# Altium PCB overlay dan masking.PcbDoc (part 3 of 3)
Units mil, origin at the board's own origin, x right, y up, seen from the top; angles counter-clockwise.
Board outline 6000 x 4000 mil, 2 copper layers (Top Layer, Bottom Layer); 120 components, 0 nets, 410 pads, 0 vias.
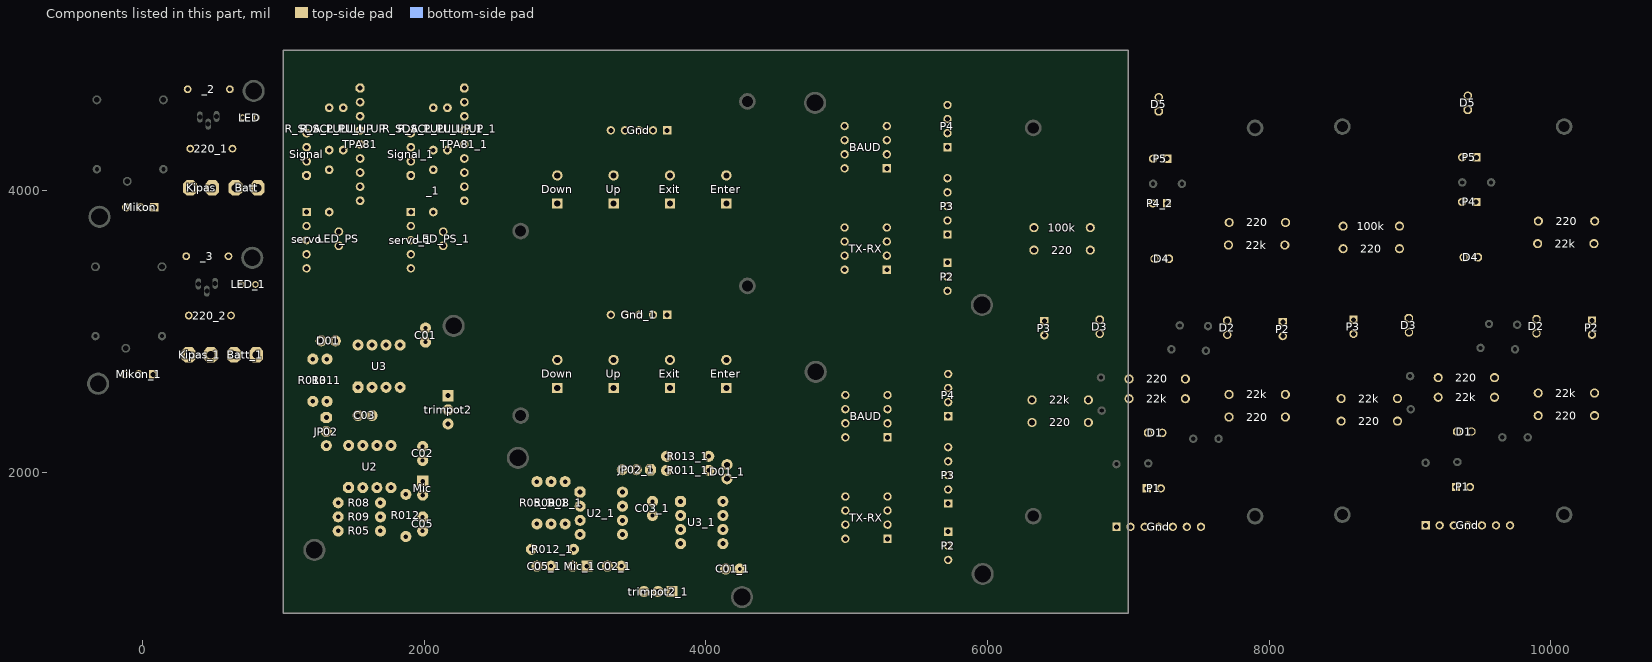
[diagram p3: the components of this part, seen from the top]

## Nets (pads, with @x,y where several pads share a name; then routed paths per layer and width w, separated by ;. In a path a pad name is that pad's centre, name@x,y a point inside that pad or via, vN(x,y) a via of type N, cw(c..) or ccw(c..) an arc to the next point about the centre after c; other vN are vias at no path point) (continued)
copper on no net: (continued)
  Bottom Layer w23.62: -347.68,2964.68 27.2,3339.57 397.28,3339.57 ; -337.68,4149.69 37.2,4524.57 407.28,4524.57 ; -334.06,2969.17 -320.67,2969.17 ; -324.06,4154.17 -310.67,4154.17 ; -125.55,2697.83 -197.2,2769.49 -197.2,2892.9 24.89,3115 328.7,3115 ; -115.55,3882.83 -187.2,3954.49 -187.2,4077.9 34.89,4300 338.7,4300 ; -39.25,2697.83 -25.55,2697.83 -25.55,2637.2 -59.41,2603.35 -165.71,2603.35 -205.08,2642.72 -205.08,2701.77 -327.13,2823.82 -386.18,2823.82 -457.05,2894.68 -457.05,3182.09 -102.72,3536.42 310.28,3536.42 ; -29.25,3882.83 -15.55,3882.83 -15.55,3822.2 -49.41,3788.35 -155.71,3788.35 -195.08,3827.72 -195.08,3886.77 -317.13,4008.82 -376.18,4008.82 -447.05,4079.68 -447.05,4367.09 -92.72,4721.42 320.28,4721.42 ; 74.45,2697.83 157.13,2615.16 779.17,2615.16 909.09,2745.08 909.09,3128.15 701.61,3335.63 693.74,3343.5 515.39,3343.5 523.27,3351.38 ; 84.45,3882.83 167.13,3800.16 789.17,3800.16 919.09,3930.08 919.09,4313.15 711.61,4520.63 703.74,4528.5 525.39,4528.5 533.27,4536.38 ; 456.34,3288.39 628.7,3116.02 628.7,3115 ; 466.34,4473.39 638.7,4301.02 638.7,4300 ; 610.28,3536.42 610.28,3526.97 801.61,3335.63 ; 620.28,4721.42 620.28,4711.97 811.61,4520.63 ; 1145,4110 1245,4010 1245,3750 1275.62,3719.38 1384.5,3610.5 1454.5,3610.5 1455,3610 1465,3610 1485,3630 1485,3710 1425,3770 1405,3790 1405,4091.25 1482.5,4168.75 1482.5,4255.89 1545,4318.38 1545,4330 ; 1145,4210 1178.6,4176.4 1318.6,4176.4 1325,4170 ; 1154.08,4200.92 1102.5,4252.5 1102.5,4281.62 1102.5,4467.5 1225,4590 1325,4590 1425,4590 1425,4650 1505,4730 1545,4730 ; 1165,3450 1205,3450 1245,3490 1285,3530 1465,3530 1545,3610 1545,3730 1465,3810 1465,4090 1505,4130 1545,4130 ; 1165,3550 1205,3550 1245,3590 1245,3670 1165,3750 ; 1165,3650 1145,3650 1105,3690 1105,3722.68 1103.98,3723.7 1103.98,3788.98 1165,3850 ; 1165,4310 1180.01,4310 1262.5,4227.5 1321.69,4227.5 1362.5,4227.5 1365,4230 1425,4290 1425,4430 1525,4530 1545,4530 ; 1165,4410 1265,4410 1325,4410 ; 1325,3850 1325,3770 1385,3710 ; 1325,4290 1325,4410 ; 1329.03,4414.03 1325,4410 ; 1525,4030 1545,4030 ; 1525,4630 1545,4630 1445,4530 1325,4410 ; 1545,4050 1545,4030 ; 1885,4110 1985,4010 1985,3750 2015.62,3719.38 2124.5,3610.5 2194.5,3610.5 2195,3610 2205,3610 2225,3630 2225,3710 2165,3770 2145,3790 2145,4091.25 2222.5,4168.75 2222.5,4255.89 2285,4318.38 2285,4330 ; 1885,4210 1918.6,4176.4 2058.6,4176.4 2065,4170 ; 1894.08,4200.92 1842.5,4252.5 1842.5,4281.62 1842.5,4467.5 1965,4590 2065,4590 2165,4590 2165,4650 2245,4730 2285,4730 ; 1905,3450 1945,3450 1985,3490 2025,3530 2205,3530 2285,3610 2285,3730 2205,3810 2205,4090 2245,4130 2285,4130 ; 1905,3550 1945,3550 1985,3590 1985,3670 1905,3750 ; 1905,3650 1885,3650 1845,3690 1845,3722.68 1843.98,3723.7 1843.98,3788.98 1905,3850 ; 1905,4310 1920.01,4310 2002.5,4227.5 2061.69,4227.5 2102.5,4227.5 2105,4230 2165,4290 2165,4430 2265,4530 2285,4530 ; 1905,4410 2005,4410 2065,4410 ; 2065,3850 2065,3770 2125,3710 ; 2065,4290 2065,4410 ; 2069.03,4414.03 2065,4410 ; 2265,4030 2285,4030 ; 2265,4630 2285,4630 2185,4530 2065,4410 ; 2285,4050 2285,4030 ; 4971.32,3651.26 4920,3575 ; 4971.91,3428.06 5056.14,3348.86 ; 4973.5,3553.47 5064.64,3619.64 4998.47,3528.5 ; 4973.5,4146.53 5064.64,4080.36 ; 4973.5,4273.47 5064.64,4339.64 4998.47,4248.5 ; 4976.32,1741.26 4925,1665 ; 4976.91,1518.06 5061.14,1438.86 ; 4978.5,1643.47 5069.64,1709.64 5003.47,1618.5 ; 4978.5,2236.53 5069.64,2170.36 ; 4978.5,2363.47 5069.64,2429.64 5003.47,2338.5 ; 4985,3440 5056.14,3348.86 ; 4985,3540 5155,3710 5155,3775 5470,4090 5715,4090 ; 4985,4260 5335,4610 5715,4610 ; 4987.24,3722.43 5055,3740 ; 4987.24,3757.57 5055,3740 ; 4990,1530 5061.14,1438.86 ; 4990,1630 5160,1800 5160,1865 5475,2180 5720,2180 ; 4990,2350 5340,2700 5720,2700 ; 4992.24,1812.43 5060,1830 ; 4992.24,1847.57 5060,1830 ; 4995,3410 5115,3290 5715,3290 ; 4996.26,3626.32 4920,3575 ; 4998.47,4171.5 5064.64,4080.36 ; 4999.76,3449.8 5056.14,3348.86 ; 5000,1500 5120,1380 5720,1380 ; 5001.26,1716.32 4925,1665 ; 5003.47,2261.5 5069.64,2170.36 ; 5004.76,1539.8 5061.14,1438.86 ; 5267.35,3738.43 5285,3640 ; 5267.35,3741.57 5267.35,3641.57 ; 5267.91,3735.34 5302.65,3641.57 ; 5271.47,3528.56 5210,3615 ; 5272.35,1828.43 5290,1730 ; 5272.35,1831.57 5272.35,1731.57 ; 5272.91,1825.34 5307.65,1731.57 ; 5273.5,4173.47 5364.64,4239.64 5298.47,4148.5 ; 5273.5,4273.47 5364.64,4339.64 5298.47,4248.5 ; 5274.14,3754 5335,3790 ; 5276.47,1618.56 5215,1705 ; 5278.5,2263.47 5369.64,2329.64 5303.47,2238.5 ; 5278.5,2363.47 5369.64,2429.64 5303.47,2338.5 ; 5279.14,1844 5340,1880 ; 5285,3540 5210,3615 ; 5285,4160 5435,4310 5715,4310 ; 5285,4260 5535,4510 5715,4510 ; 5290,1630 5215,1705 ; 5290,2250 5440,2400 5720,2400 ; 5290,2350 5540,2600 5720,2600 ; 5296.44,3553.53 5210,3615 ; 5299,3729.14 5335,3790 ; 5301.44,1643.53 5215,1705 ; 5302.09,3735.34 5267.35,3641.57 ; 5302.65,3738.43 5285,3640 ; 5302.65,3741.57 5302.65,3641.57 ; 5304,1819.14 5340,1880 ; 5307.09,1825.34 5272.35,1731.57 ; 5307.65,1828.43 5290,1730 ; 5307.65,1831.57 5307.65,1731.57 ; 5697.35,3491.56 5715,3590.39 5732.65,3491.56 ; 5697.35,3688.44 5715,3589.61 5732.65,3688.44 ; 5702.35,1581.56 5720,1680.39 5737.65,1581.56 ; 5702.35,1778.44 5720,1679.61 5737.65,1778.44 ; 5703.56,4003.53 5790,4065 ; 5707.84,3373.79 5795,3345 ; 5708.56,2093.53 5795,2155 ; 5712.84,1463.79 5800,1435 ; 5713.44,3272.35 5614.61,3290 5713.44,3307.65 ; 5713.44,3772.35 5614.61,3790 5713.44,3807.65 ; 5713.44,3872.35 5614.61,3890 5713.44,3907.65 ; 5713.44,4072.35 5614.61,4090 5713.44,4107.65 ; 5713.44,4292.35 5614.61,4310 5713.44,4327.65 ; 5713.44,4492.35 5614.61,4510 5713.44,4527.65 ; 5713.44,4592.35 5614.61,4610 5713.44,4627.65 ; 5715,3490 5715,3690 ; 5715,3790 5335,3790 ; 5715,3890 5331.25,3890 5210,3768.75 5210,3615 ; 5715,3990 5790,4065 ; 5715,4410 5760,4410 ; 5718.44,1362.35 5619.61,1380 5718.44,1397.65 ; 5718.44,1862.35 5619.61,1880 5718.44,1897.65 ; 5718.44,1962.35 5619.61,1980 5718.44,1997.65 ; 5718.44,2162.35 5619.61,2180 5718.44,2197.65 ; 5718.44,2382.35 5619.61,2400 5718.44,2417.65 ; 5718.44,2582.35 5619.61,2600 5718.44,2617.65 ; 5718.44,2682.35 5619.61,2700 5718.44,2717.65 ; 5718.49,4392.63 5760,4410 ; 5718.49,4427.37 5760,4410 ; 5720,1580 5720,1780 ; 5720,1880 5340,1880 ; 5720,1980 5336.25,1980 5215,1858.75 5215,1705 ; 5720,2080 5795,2155 ; 5720,2500 5765,2500 ; 5723.49,2482.63 5765,2500 ; 5723.49,2517.37 5765,2500 ; 5725.14,3404.53 5795,3345 ; 5728.53,3978.56 5790,4065 ; 5730.14,1494.53 5800,1435 ; 5733.53,2068.56 5795,2155 ; 1545,4030 1625,4110 1625,4690 1585,4730 1545,4730 ; 1545,4730 1525,4710 1545,4730 ; 2285,4030 2365,4110 2365,4690 2325,4730 2285,4730 ; 2285,4730 2265,4710 2285,4730 ; 4920,3575 4985,3640 4920,3575 ; 4920,3575 4920,3390 5130,3180 5715,3180 5795,3260 5795,3345 ; 4925,1665 4990,1730 4925,1665 ; 4925,1665 4925,1480 5135,1270 5720,1270 5800,1350 5800,1435 ; 5055,3740 4985,3740 5055,3740 ; 5055,3740 5480,4165 5745,4165 5790,4120 5790,4065 ; 5060,1830 4990,1830 5060,1830 ; 5060,1830 5485,2255 5750,2255 5795,2210 5795,2155 ; 5064.64,4080.36 4985,4160 5100,4045 5298.75,4045 5462.06,4208.31 5753.31,4208.31 5795,4250 5795,4375 5760,4410 ; 5069.64,2170.36 4990,2250 5105,2135 5303.75,2135 5467.06,2298.31 5758.31,2298.31 5800,2340 5800,2465 5765,2500 ; 5267.35,3641.57 5285,3740 ; 5267.35,3641.57 5285,3740 ; 5272.35,1731.57 5290,1830 ; 5272.35,1731.57 5290,1830 ; 5285,3640 5285,3740 ; 5285,3640 5285,3740 ; 5285,3740 5302.65,3641.57 ; 5285,3740 5302.65,3641.57 ; 5285,3740 5335,3790 ; 5290,1730 5290,1830 ; 5290,1730 5290,1830 ; 5290,1830 5307.65,1731.57 ; 5290,1830 5307.65,1731.57 ; 5290,1830 5340,1880 ; 5715,3390 5795,3345 ; 5715,3390 5750,3390 ; 5715,3390 5750,3390 ; 5715,3390 5750,3390 ; 5720,1480 5800,1435 ; 5720,1480 5755,1480 ; 5720,1480 5755,1480 ; 5720,1480 5755,1480 ; 5750,3390 5719.48,3372.86 5750,3390 ; 5750,3390 5719.48,3407.14 5750,3390 ; 5750,3390 5795,3345 ; 5755,1480 5724.48,1462.86 5755,1480 ; 5755,1480 5724.48,1497.14 5755,1480 ; 5755,1480 5800,1435
  Bottom Layer w31.5: 1209.45,2805.63 1209.45,2875.63 1268.95,2935.13 1268.95,2940.92 ; 1304.85,2291.35 1248.19,2289.25 1189.13,2289.25 1185.2,2285.31 ; 1309.45,2505.63 1216.54,2505.63 1185.2,2474.29 1185.2,2285.31 ; 1310.01,2186.19 1529.45,2405.63 1445.04,2490.04 1445.04,2652.24 1629.45,2836.65 1629.45,2905.63 1629.45,2965.79 1744.25,3080.59 1954.49,3080.59 2009.45,3025.63 2015.24,3025.63 2149.76,2891.1 2149.76,2694.16 2244.25,2599.68 2244.25,2314.65 2040.43,2110.83 2014.65,2110.83 1989.45,2085.63 ; 1326.93,2413.43 1304.85,2391.35 1393.86,2480.36 1393.86,2721.22 1309.45,2805.63 1368.95,2865.13 1368.95,2935.13 1499.95,2935.13 1529.45,2905.63 ; 1389.45,1585.63 1389.45,1569.25 1559.21,1399.49 1941.1,1399.49 2109.45,1567.83 2109.45,1619.02 2109.45,1839.43 2009.03,1939.85 ; 1389.45,1785.63 1389.45,1865.63 1416.43,1892.61 1463.89,1892.61 1463.89,1910.07 1549.45,1995.63 ; 1463.89,2192.61 1463.89,2080.07 1409.45,2025.63 1269.45,2025.63 ; 1469.45,2095.63 1786.85,2095.63 1854.49,2163.27 1854.49,2593.82 1842.68,2605.63 ; 1531.65,2627.83 1531.65,2556.97 1629.45,2459.17 1629.45,2405.63 ; 1553.34,1999.52 1833.34,1999.52 1913.54,2079.72 1913.54,2160.49 1909.61,2164.43 1909.61,2206.83 1913.54,2210.77 1913.54,2647.52 1846.61,2714.45 1760,2714.45 1729.45,2683.9 1729.45,2605.63 ; 1563.89,1892.61 1547.4,1876.12 1547.4,1580.59 1622.2,1505.79 1724.57,1505.79 1791.5,1572.72 1791.5,1718.39 1724.25,1785.63 1689.45,1785.63 ; 1629.45,2605.63 1630.08,2606.26 1630.08,2686.89 1708.82,2765.63 1874.17,2765.63 1972.6,2667.2 1972.6,2197.44 1960.79,2185.63 ; 1663.89,1892.61 1663.89,1880.07 1609.45,1825.63 1609.45,1725.63 1649.45,1685.63 1689.45,1685.63 1689.45,1585.63 ; 1729.45,2905.63 1729.45,2963.43 1760,2993.98 1909.61,2993.98 1964.72,2938.86 1996.22,2938.86 2009.45,2925.63 1995.08,2911.26 1995.08,2811.59 2098.58,2708.09 2098.58,2616.5 2169.45,2545.63 2169.45,2445.63 ; 1763.89,1892.61 1811.14,1939.85 2009.03,1939.85 ; 1791.5,1645.63 1899.45,1645.63 1945.22,1599.85 2009.03,1599.85 ; 1829.45,2905.63 1829.45,2904.84 2047.4,2686.89 2047.4,2383.74 2085.51,2345.63 2169.45,2345.63 ; 1869.45,1555.63 1869.45,1536.5 1783.62,1450.67 1604.94,1450.67 1464.72,1590.89 1464.72,1650.35 1429.45,1685.63 1389.45,1685.63 1309.45,1685.63 1269.45,1725.63 1269.45,2025.63 ; 1869.45,1845.63 2003.25,1845.63 2009.03,1839.85 1988.35,1819.17 1988.35,1720.54 2009.03,1699.85 ; 1969.45,2085.63 1987.32,2067.76 ; 2009.03,2046.05 2009.03,1939.85 ; 2770.63,1455.55 2751.5,1455.55 2665.67,1541.38 2665.67,1720.06 2805.89,1860.28 2865.35,1860.28 2900.63,1895.55 2900.63,1935.55 2900.63,2015.55 2940.63,2055.55 3240.63,2055.55 ; 2800.63,1635.55 2900.63,1635.55 2900.63,1675.55 2940.63,1715.55 3040.63,1715.55 3095.07,1661.11 3107.61,1661.11 ; 2800.63,1935.55 2784.25,1935.55 2614.49,1765.79 2614.49,1383.9 2782.83,1215.55 2834.02,1215.55 3054.43,1215.55 3154.85,1315.97 ; 2814.85,1315.97 2814.85,1379.78 2860.63,1425.55 2860.63,1533.5 ; 2914.85,1315.97 2935.54,1336.65 3034.17,1336.65 3054.85,1315.97 3060.63,1321.75 3060.63,1455.55 ; 3000.63,1635.55 3000.63,1600.75 2933.39,1533.5 2787.72,1533.5 2720.79,1600.43 2720.79,1702.8 2795.59,1777.6 3091.12,1777.6 3107.61,1761.11 ; 3000.63,1935.55 3080.63,1935.55 3107.61,1908.57 3107.61,1861.11 3125.07,1861.11 3210.63,1775.55 ; 3107.61,1561.11 3154.85,1513.86 3154.85,1315.97 ; 3214.52,1771.66 3214.52,1491.66 3294.72,1411.46 3375.49,1411.46 3379.43,1415.39 3421.83,1415.39 3425.77,1411.46 3862.52,1411.46 3929.45,1478.39 3929.45,1565 3898.9,1595.55 3820.63,1595.55 ; 3261.05,1315.97 3154.85,1315.97 ; 3282.76,1337.68 3300.63,1355.55 ; 3300.63,1335.55 3325.83,1310.35 3325.83,1284.57 3529.65,1080.75 3814.68,1080.75 3909.16,1175.24 4106.1,1175.24 4240.63,1309.76 4240.63,1315.55 4295.59,1370.51 4295.59,1580.75 4180.79,1695.55 4120.63,1695.55 4051.65,1695.55 3867.24,1879.96 3705.04,1879.96 3620.63,1795.55 3401.19,2014.99 ; 3310.63,1855.55 3310.63,1538.15 3378.27,1470.51 3808.82,1470.51 3820.63,1482.32 ; 3400.63,1364.21 3412.44,1352.4 3882.2,1352.4 3980.63,1450.83 3980.63,1616.18 3901.89,1694.92 3821.26,1694.92 3820.63,1695.55 ; 3407.61,1861.11 3295.07,1861.11 3240.63,1915.55 3240.63,2055.55 ; 3506.35,2020.15 3504.25,2076.81 3504.25,2135.87 3500.31,2139.8 ; 3560.63,1155.55 3560.63,1239.49 3598.74,1277.6 3901.89,1277.6 4119.84,1495.55 4120.63,1495.55 ; 3620.63,1695.55 3674.17,1695.55 3771.97,1793.35 3842.83,1793.35 ; 3628.43,1998.07 3606.35,2020.15 3695.36,1931.14 3936.22,1931.14 4020.63,2015.55 4080.13,1956.05 4150.13,1956.05 4150.13,1825.05 4120.63,1795.55 ; 3660.63,1155.55 3760.63,1155.55 3831.5,1226.42 3923.09,1226.42 4026.59,1329.92 4126.26,1329.92 4140.63,1315.55 4153.86,1328.78 4153.86,1360.28 4208.98,1415.39 4208.98,1565 4178.43,1595.55 4120.63,1595.55 ; 3720.63,2015.55 3720.63,2108.46 3689.29,2139.8 3500.31,2139.8 ; 4020.63,2115.55 4090.63,2115.55 4150.13,2056.05 4155.92,2056.05 ; 1185.2,2285.31 1185.2,2104.21 1263.78,2025.63 1269.45,2025.63 ; 3240.63,2055.55 3240.63,2061.22 3319.21,2139.8 3500.31,2139.8
  Bottom Layer w39.37: -118.46,2882.56 -19.72,2981.3 125.63,2981.3 183.11,2923.82 183.11,2793.9 279.17,2697.83 590.2,2697.83 650.51,2758.15 650.51,2835.63 ; -108.46,4067.56 -9.72,4166.3 135.63,4166.3 193.11,4108.82 193.11,3978.9 289.17,3882.83 600.2,3882.83 660.51,3943.15 660.51,4020.63 ; 138.39,3473.43 35.08,3473.43 -405.87,3032.48 -405.87,2941.93 -350.75,2886.81 -291.69,2886.81 62.64,3241.14 342.17,3241.14 424.84,3158.46 424.84,3075.79 327.68,2978.62 327.68,2835.63 327.68,2870.46 ; 148.39,4658.43 45.08,4658.43 -395.87,4217.48 -395.87,4126.93 -340.75,4071.81 -281.69,4071.81 72.64,4426.14 352.17,4426.14 434.84,4343.46 434.84,4260.79 337.68,4163.62 337.68,4020.63 337.68,4055.46 ; 485.16,2835.63 485.16,2923.5 570.51,3008.86 727.99,3008.86 814.61,2922.24 814.61,2865.87 784.37,2835.63 ; 495.16,4020.63 495.16,4108.5 580.51,4193.86 737.99,4193.86 824.61,4107.24 824.61,4050.87 794.37,4020.63 ; 626.89,2835.63 629.57,2832.95 ; 636.89,4020.63 639.57,4017.95

## Polygon pours and split planes (outlines as drawn)
no net on Bottom Layer "Bottom Layer-No Net" (solid, pour order 1000): -500.35,2536.42 -500.35,3619.09 956.34,3619.09 956.34,2536.42
no net on Bottom Layer "Bottom Layer-No Net" (solid, pour order 1000): -490.35,3721.42 -490.35,4804.09 966.34,4804.09 966.34,3721.42
no net on Bottom Layer "Bottom Layer-No Net" (solid, pour order 1000): 8385,1350 8385,4835 10455,4835 10460,4830 10460,1345
no net on Bottom Layer "Bottom Layer-No Net" (solid, pour order 1000): 6190,1340 6190,4825 8260,4825 8265,4820 8265,1335
no net on Bottom Layer "Bottom Layer-No Net" (solid): 4650,2875 6085,2875 6085,1150 6080,1145 4650,1145
no net on Bottom Layer "Bottom Layer-No Net" (solid): 4645,4785 6080,4785 6080,3060 6075,3055 4645,3055
no net on Bottom Layer "Bottom Layer-No Net" (solid, pour order 1000): 4358.58,2210.67 4358.58,1005.94 2567.24,1005.94 2567.24,2206.73 2563.31,2210.67
no net on Bottom Layer "Bottom Layer-No Net" (solid, pour order 1000): 1114.33,3143.58 2319.06,3143.58 2319.06,1352.24 1118.27,1352.24 1114.33,1348.31
no net on Bottom Layer "Bottom Layer-No Net" (solid, pour order 1000): 2550,3495 4465,3495 4465,2280 4455,2290 2550,2290
no net on Bottom Layer "Bottom Layer-No Net" (solid, pour order 1000): 2550,4805 4465,4805 4465,3590 4455,3600 2550,3600

## Keep-outs
Keep-Out Layer:
  lines w19.68: 1114.33,3143.58 1114.33,1340.43 2311.18,1340.43 ; 1114.33,3147.52 2315.12,3147.52 ; 2319.06,1340.43 2319.06,3143.58 ; 2555.43,1005.94 4358.58,1005.94 ; 2555.43,1013.82 2555.43,2210.67 4358.58,2210.67 ; 4362.52,1009.88 4362.52,2210.67 ; -500.35,2536.42 -500.35,3619.09 956.34,3619.09 956.34,2536.42 -500.35,2536.42 ; -490.35,3721.42 -490.35,4804.09 966.34,4804.09 966.34,3721.42 -490.35,3721.42
  lines w23.62: 1045,3390 1145,3290 1585,3290 1685,3390 1685,4750 1605,4830 1125,4830 1045,4750 1045,3390 ; 1785,3390 1785,4750 1865,4830 2345,4830 2425,4750 2425,3390 2325,3290 1885,3290 1785,3390
  lines w29.53: 8275.22,4840 6168.64,4840 6168.64,1325 8285,1325 ; 8295,1325 8295,4836.3 ; 10470.22,4850 8363.64,4850 8363.64,1335 10480,1335 ; 10490,1335 10490,4846.3
  lines w40: 2550,2280 4465,2280 4465,3495 2550,3495 2550,2290 2555,2285 ; 2550,3590 4465,3590 4465,4805 2550,4805 2550,3600 2555,3595

## Other copper
Multi-Layer:
  circle w10: c1328.43,3430 r56.57
  circle w10: c1308.43,4730 r56.57
  circle w10: c2048.43,4730 r56.57
  circle w10: c2068.43,3430 r56.57

## Silkscreen, mask and mechanical layers (free items; w line width, h text height)
Top Overlay:
  lines w7.87: 380.75,3394.06 ccw(c458.7,3335) 536.65,3394.06 380.75,3394.05 ; 390.75,4579.06 ccw(c468.7,4520) 546.65,4579.06 390.75,4579.06
  lines w10: -394.06,2802.17 196.5,2802.17 196.5,3579.72 -394.06,3579.72 -394.06,2802.17 ; -384.06,3987.17 206.5,3987.17 206.5,4764.72 -384.06,4764.72 -384.06,3987.17
  text "KET: Masking+Overlay+single layer" at 2950,5550 h160
  text "330" at 433.27,4708.5 h31.5
  text "1" at 584.45,4592.76 h59.05 r90
  text "3" at 411.22,4588.82 h59.05 r90
  text "G" at 743.66,4584.57 h60 r90
  text "G" at 1145,3950 h60
  text "G" at 1885,3950 h60
  text "G" at 116.73,3945.51 h60 r90
  text "G" at 856.57,3827.56 h60 r180
  text "G" at 536.42,3826.46 h60 r180
  text "330" at 423.27,3523.5 h31.5
  text "1" at 574.45,3407.76 h59.05 r90
  text "3" at 401.22,3403.82 h59.05 r90
  text "G" at 733.66,3399.57 h60 r90
  text "G" at 106.73,2760.51 h60 r90
  text "G" at 846.57,2642.56 h60 r180
  text "G" at 526.42,2641.46 h60 r180
  text "Lo" at 2102.52,2553.03 h39.37 r89.55
  text "Wip" at 2094.65,2407.36 h39.37 r90
  text "D" at 1212.76,2371.93 h43.31
  text "Hi" at 2098.58,2305 h39.37 r88.15
  text "V" at 1208.82,2269.57 h43.31
  text "G" at 1212.76,2171.14 h43.31
  text "V" at 3484.57,2116.18 h43.31 r270
  text "G" at 3386.14,2112.24 h43.31 r270
  text "D" at 3586.93,2112.24 h43.31 r270
  text "+" at 2122.2,1816.81 h60 r90
  text "Wip" at 3622.36,1230.35 h39.37
  text "Hi" at 3520,1226.42 h39.37 r358.15
  text "Lo" at 3768.03,1222.48 h39.37 r359.55
  text "+" at 3031.81,1202.8 h60
Mechanical 1:
  lines w19.68: 4625,3020 6100,3020 6100,4810 4625,4810 4625,3020 ; 4630,1110 6105,1110 6105,2900 4630,2900 4630,1110
Mechanical 15:
  lines w3.94: 439.02,3335 478.39,3335 ; 449.02,4520 488.39,4520 ; 458.7,3315.32 458.7,3354.68 ; 468.7,4500.31 468.7,4539.69